# EAGLE board sch1 (EAGLE 9.6.2)
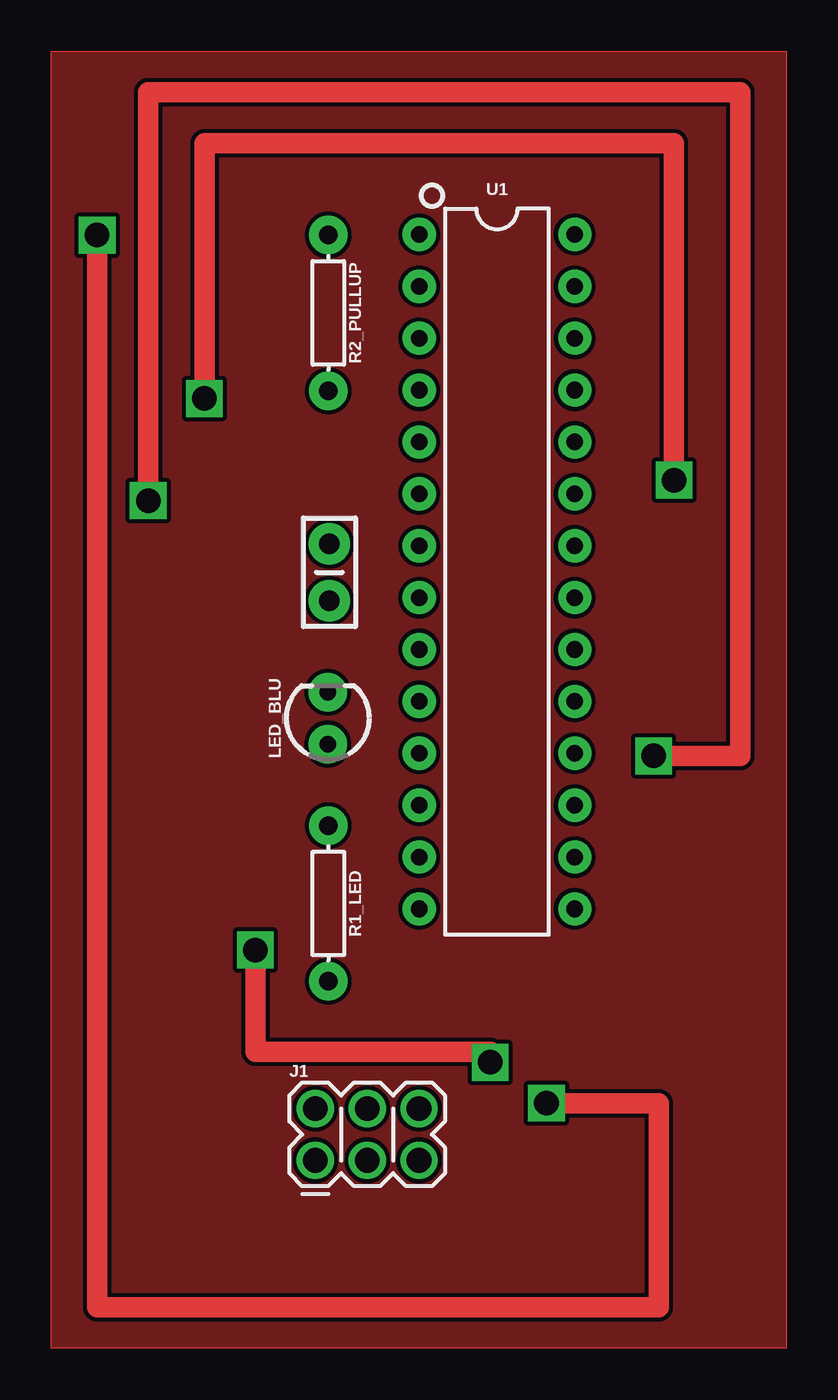
[diagram p0: board, top side]
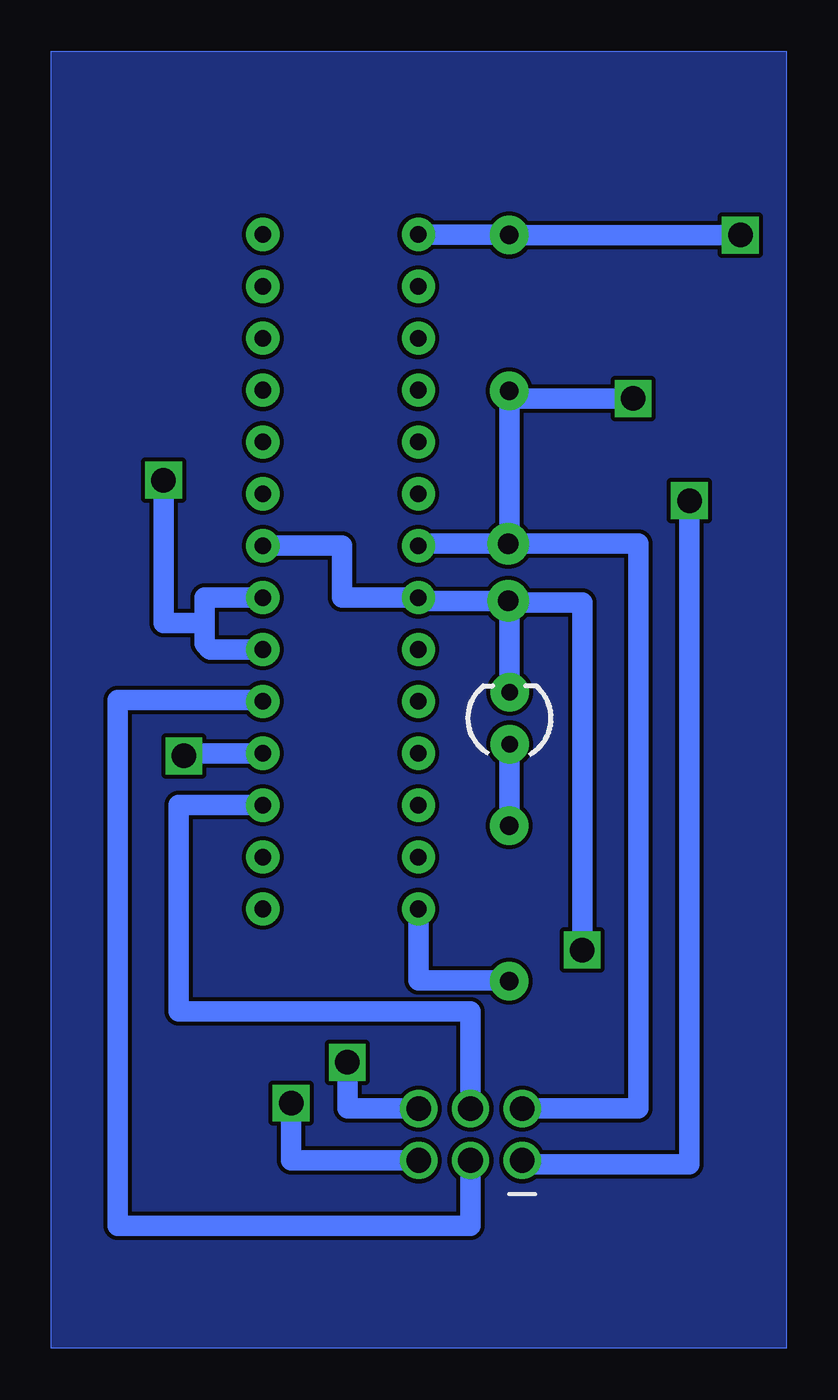
[diagram p1: board, bottom side, seen from below]

No outline drawn. Coordinates in mm, seen from the top.
Copper layers (1*16): Top 0.035mm / dielectric 1.5mm / Bottom 0.035mm
Design rules "SparkFun": minimum track width 8mil, minimum drill 20mil, track to track 8mil, track to pad 8mil, pad to pad 8mil, via to via 8mil, smd to smd 8mil, copper to edge 8mil, drill to drill 8mil, minimum pad ring 12mil, minimum via ring 10mil, stop-mask expansion 4mil, vias tented up to drill 20mil, thermal gap 10mil

## Footprints (pad centres in the part's own frame; a part is rotated, then mirrored left to right if it is on the bottom)
CAP-PTH-SMALL-KIT = drill 1.016 pad 2.032: 1 -1.397,0; 2 1.397,0
2X3_POGO = drill 1.2 pad 1.829: P$1 0,0; P$2 0,2.54; P$3 2.54,0; P$4 2.54,2.54; P$5 5.08,0; P$6 5.08,2.54
LED_3MM = drill 0.813 pad 1.88: A -1.27,0; K 1.27,0
AXIAL-0.3 = drill 0.9 pad 1.88: P$1 -3.81,0; P$2 3.81,0
DIP28 = drill 0.813 pad 1.626: 1 -16.51,-3.81; 2 -13.97,-3.81; 3 -11.43,-3.81; 4 -8.89,-3.81; 5 -6.35,-3.81; 6 -3.81,-3.81; 7 -1.27,-3.81; 8 1.27,-3.81; 9 3.81,-3.81; 10 6.35,-3.81; 11 8.89,-3.81; 12 11.43,-3.81; 13 13.97,-3.81; 14 16.51,-3.81; 15 16.51,3.81; 16 13.97,3.81; 17 11.43,3.81; 18 8.89,3.81; 19 6.35,3.81; 20 3.81,3.81; 21 1.27,3.81; 22 -1.27,3.81; 23 -3.81,3.81; 24 -6.35,3.81; 25 -8.89,3.81; 26 -11.43,3.81; 27 -13.97,3.81; 28 -16.51,3.81

## Placement (x,y rotation side)
C1_DECOUP  0.1uF  [CAP-PTH-SMALL-KIT]  13.62,37.99 90 top
J1  [2X3_POGO]  12.93,9.2 0 top
LED_BLU  [LED_3MM]  13.55,30.85 90 top
R1_LED  200  [AXIAL-0.3]  13.57,21.78 270 top
R2_PULLUP  10k  [AXIAL-0.3]  13.57,50.69 270 top
U1  328P  [DIP28]  21.83,38.02 270 top

## Library data of the parts
C1_DECOUP = SparkFun-Capacitors; PROD_ID: CAP-08370
J1 = SparkFun-Connectors; PROD_ID: HW-11044
LED_BLU = SparkFun-LED; PROD_ID: DIO-08794
R1_LED = SparkFun-Resistors; PROD_ID: RES-08380
R2_PULLUP = SparkFun-Resistors; PROD_ID: RES-12183
U1 = SparkFun-IC-Microcontroller; PROD_ID: IC-09136

## Nets
GND: C1_DECOUP.1 J1.P$6 LED_BLU.K U1.8 U1.22
MISO: J1.P$1 U1.18
MOSI: J1.P$4 U1.17
N$2: LED_BLU.A R1_LED.P$1
N$3: R1_LED.P$2 U1.14
RST: J1.P$5 R2_PULLUP.P$1 U1.1
SCK: J1.P$3 U1.19
VCC: C1_DECOUP.2 J1.P$2 R2_PULLUP.P$2 U1.7 U1.20 U1.21

## Tracks (layer width: path | path; a pad name or v marks a point on that pad's centre or on a via)
GND  (via drill 1.2)
  Top 1: v21.5,14 21.5,14.5 10,14.5 v10,19.5
  Bottom 1: U1.22 21.75,39.29 21.75,36.75 U1.8 17.86,36.59 C1_DECOUP.1 | J1.P$6 21.5,11.74 v21.5,14 | v10,19.5 10,36.5 13.62,36.5 C1_DECOUP.1 | LED_BLU.K 13.55,36.59 C1_DECOUP.1
MISO  (via drill 1.2)
  Top 1: v29.5,29 33.75,29 33.75,61.5 4.75,61.5 v4.75,41.5
  Bottom 1: U1.18 29.37,29.13 v29.5,29 | J1.P$1 12.93,9 4.75,9 v4.75,41.5
MOSI
  Bottom 1: J1.P$4 15.47,16.5 29.75,16.5 29.75,26.59 U1.17
N$1
  Top 0.009: 36,0 0,0 0,63.5 36,63.5 36,0
  Bottom 0.009: 0,63.5 0,0 36,0 36,63.5 0,63.5
  pour Top: 36,0 0,0 0,63.5 36,63.5
  pour Bottom: 0,63.5 0,0 36,0 36,63.5
N$2
  Bottom 1: R1_LED.P$1 13.55,25.59 LED_BLU.A
N$3
  Bottom 1: R1_LED.P$2 13.6,18 18,18 18.02,18.02 U1.14
RST  (via drill 1.2)
  Top 1: v24.25,12 29.75,12 29.75,2 2.25,2 v2.25,54.5
  Bottom 1: J1.P$5 24.25,9.2 v24.25,12 | v2.25,54.5 R2_PULLUP.P$1 13.6,54.53 U1.1
SCK
  Bottom 1: J1.P$3 15.47,6 32.75,6 32.75,31.75 25.64,31.75 U1.19
VCC  (via drill 1.2)
  Top 1: v30.5,42.5 30.5,59 7.5,59 v7.5,46.5
  Bottom 1: U1.20 28.21,34.21 28.5,34.5 28.5,35.5 | 28.5,35.5 28.5,36.75 U1.21 | 28.5,35.5 30.5,35.5 v30.5,42.5 | J1.P$2 7.25,11.74 7.25,39.39 13.57,39.39 | v7.5,46.5 13.57,46.5 R2_PULLUP.P$2 13.57,39.39 | U1.7 18.02,39.39 C1_DECOUP.2 13.57,39.39